# Altium PCB Altium_Export.pcbdoc
Units mil, origin at the board's own origin, x right, y up, seen from the top; angles counter-clockwise.
Board outline 6230 x 6040 mil, 2 copper layers (Top Layer, Bottom Layer); 13 components, 38 nets, 85 pads, 3 vias.
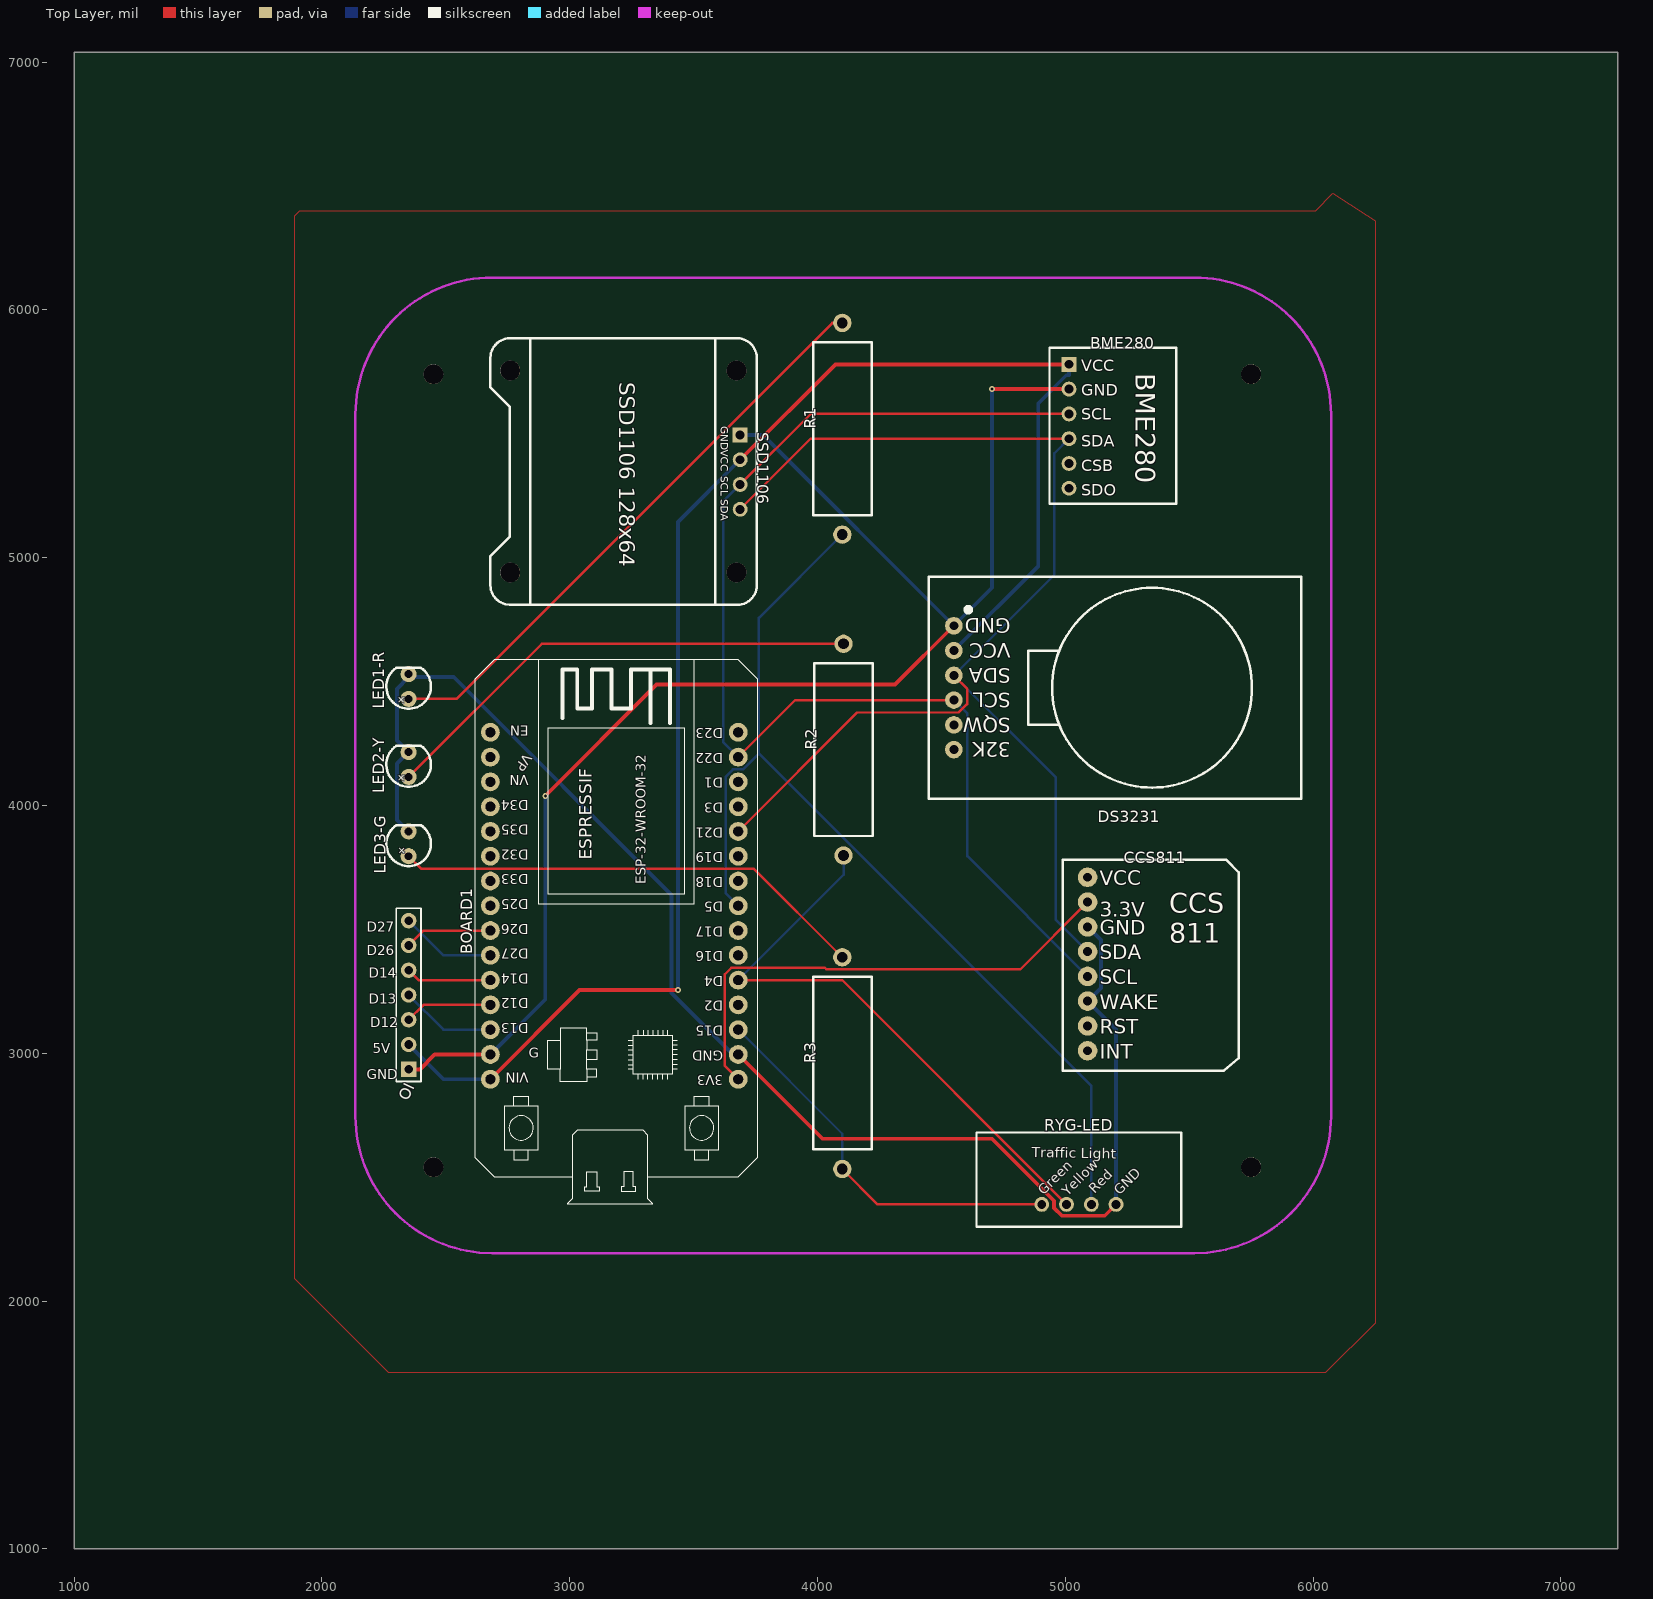
[diagram p0: Top Layer view]
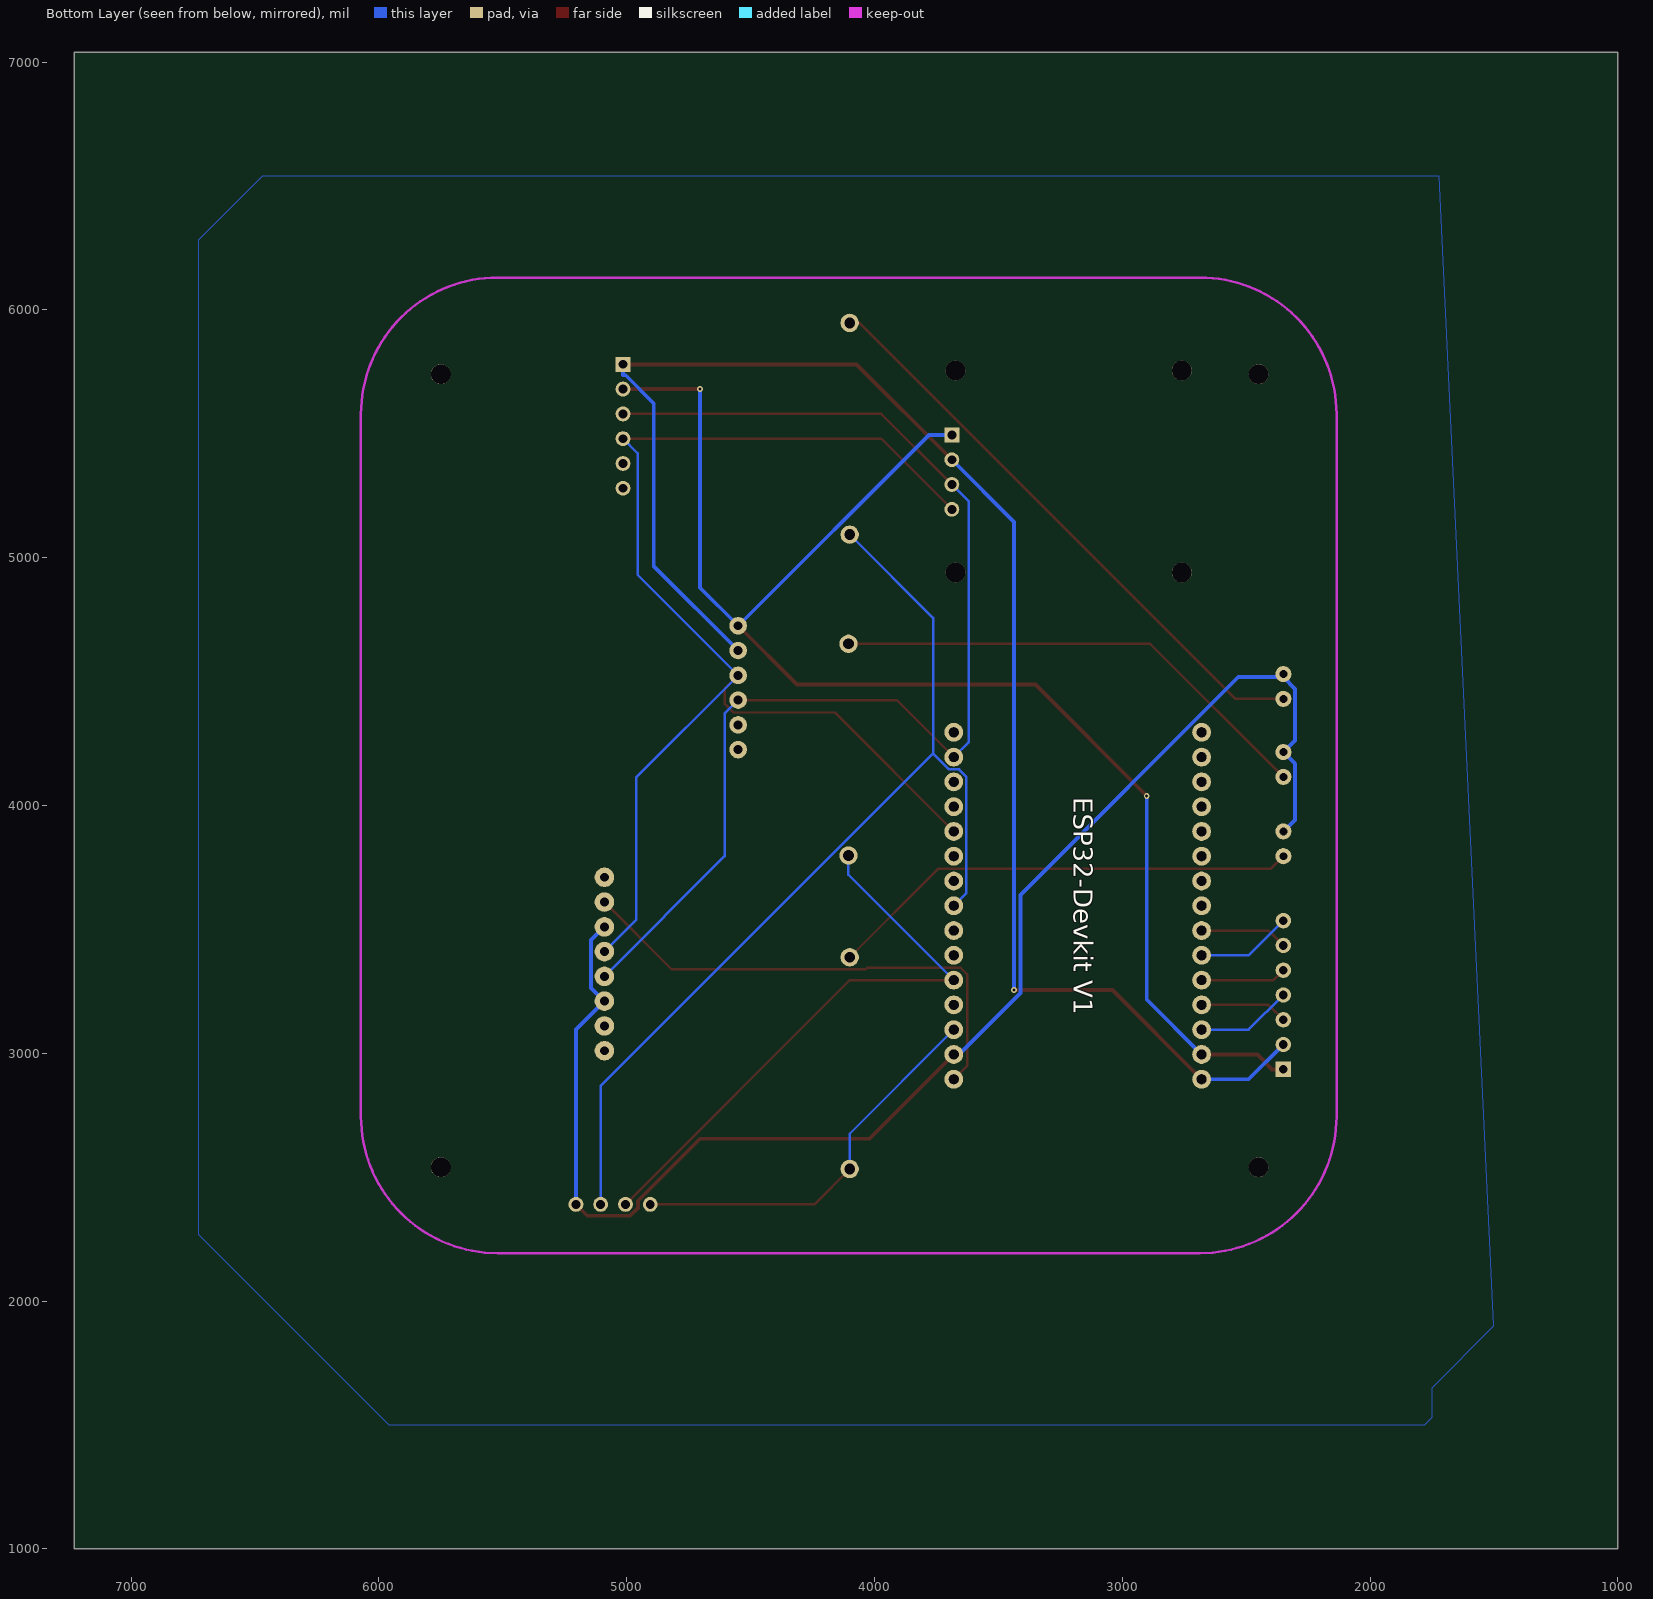
[diagram p1: Bottom Layer view, seen from below]

## Layer stack, top to bottom
Top Layer: signal copper (thickness not stored)
Dielectric: dielectric 12.6, FR-4, Dk 4.8
Bottom Layer: signal copper (thickness not stored)

## Board outline
7230,1000 1000,1000 1000,7040 7230,7040

## Components (designator, comment, footprint, x,y, rotation, side; value= is the part's Value field where it differs from the comment)
BME280 "BME280" BME280 5015,5280 r0 top
BOARD1 "ESP32DEVKITV1" ESP32-DEVKITV1 3680,2895 r90 top
CCS811 "CCS811-1" CCS811-1 4990,2930 r0 top
DS3231 "RTC DS3231" DS3231_FP 4550,4475 r180 top
IO "HEADER - HEADER-FEMALE-2.54_1X7" "HEADER - HEADER-FEMALE-2.54_1X7" 2350,2935 r180 top
LED1-R "LED THROUGH HOLE - SIMPLE" "LED-3MM-2.54MM-THROUGH HOLE" 2350,4530 r90 top
LED2-Y "LED THROUGH HOLE - SIMPLE" "LED-3MM-2.54MM-THROUGH HOLE" 2350,4215 r90 top
LED3-G "LED THROUGH HOLE - SIMPLE" "LED-3MM-2.54MM-THROUGH HOLE" 2350,3895 r90 top
R1 "100Ω" RES-TH_BD6.0-L17.5-P21.50-D0.7 4100,5520 r90 top
R2 "100Ω" RES-TH_BD6.0-L17.5-P21.50-D0.7 4105,4225 r90 top
R3 "100Ω" RES-TH_BD6.0-L17.5-P21.50-D0.7 4100,2960 r90 top
RYG-LED "TrafficLight" "TRAFFIC LIGHT SENSOR MODULE" 5055,2490 r0 top
SSD1106 "SSD1306-OLED-0.96" SSD1306 2680,5885 r270 top

## Footprints (in the part's own frame and the unit in brackets; to place one, negate y for a bottom-side part, rotate by r counter-clockwise, add the part's x,y. Pads: shape width x height; smd on the part's side, far side on the other; paste and mask are expansions set on the pad)
BME280 [mil]
  rect 60x60 hole 35.43: 1(0,500)
  round 60 hole 35.43: 2(0,400) 3(0,300) 4(0,200) 5(0,100) 6(0,0)
  silkscreen extent -79,-63 433,567
CCS811-1 [mil]
  round 78.74 hole 36: 1(100,80) 2(100,180) 3(100,280) 4(100,380) 5(100,480) 6(100,580) 7(100,680) 8(100,780)
  silkscreen extent 0,0 710,850
DS3231_FP [mm]
  round 1.8 hole 0.914: 1(0,-6.35) 2(0,-3.81) 3(0,-1.27) 4(0,1.27) 5(0,3.81) 6(0,6.35)
  silkscreen extent -35.61,-11.38 2.58,11.38
ESP32-DEVKITV1 [mil]
  round 76 hole 39.36: 3V3(0,0) D1(1200,0) D2(300,0) D3(1100,0) D4(400,0) D5(700,0) D12(300,1000) D13(200,1000) D14(400,1000) D15(200,0) D16(500,0) D17(600,0) D18(800,0) D19(900,0) D21(1000,0) D22(1300,0) D23(1400,0) D25(700,1000) D26(600,1000) D27(500,1000) D32(900,1000) D33(800,1000) D34(1100,1000) D35(1000,1000) EN(1400,1000) GND(100,1000) GND@1(100,0) VIN(0,1000) VN(1200,1000) VP(1300,1000)
  silkscreen extent -502,-79 1693,1063
"HEADER - HEADER-FEMALE-2.54_1X7" [mil]
  rect 62x62 hole 35: 1(0,0)
  round 62 hole 35: 2(0,-100) 3(0,-200) 4(0,-300) 5(0,-400) 6(0,-500) 7(0,-600)
  silkscreen extent -50,-650 50,50
"LED-3MM-2.54MM-THROUGH HOLE" [mm]
  round 1.65 hole 0.8: 1(-2.54,0) 2(0,0)
  silkscreen extent -3.55,-2.28 0.64,2.28
RES-TH_BD6.0-L17.5-P21.50-D0.7 [mil]
  round 74 hole 43.31: 1(-427.17,0) 2(427.16,0)
  silkscreen extent -348,-118 348,118
SSD1306 [mil]
  rect 60x60 hole 36: 1(390,1007.87)
  round 60 hole 36: 2(490,1007.9) 3(590,1007.9) 4(690,1007.9)
  round 80 hole 80 unplated: ""(130,993.4) ""(130,80) ""(945,993.4) ""(945,80)
  silkscreen extent 0,0 1075,1075
"TRAFFIC LIGHT SENSOR MODULE" [mil]
  round 60 hole 36: 1(-150,-100) 2(-50,-100) 3(50,-100) 4(150,-100)
  silkscreen extent -413,-190 413,190

## Free pads (board coordinates)
  round 80 hole 80 unplated: ""(2450,2540) ""(2450,5740) ""(5750,2540) ""(5750,5740)

## Via types
v1: diameter 24.02, hole 12.01, Top Layer to Bottom Layer, tented both sides, 3 vias

## Nets (pads, with @x,y where several pads share a name; then routed paths per layer and width w, separated by ;. In a path a pad name is that pad's centre, name@x,y a point inside that pad or via, vN(x,y) a via of type N, cw(c..) or ccw(c..) an arc to the next point about the centre after c; other vN are vias at no path point)
3.3V: BOARD1.3V3 CCS811.7 | length 2034.9
  Top Layer w10: BOARD1.3V3 3626.57,2948.43 3626.57,3318.78 3652.79,3345 4030.05,3345 4036.04,3339.01 4819.01,3339.01 CCS811.7
5V: BME280.1 BOARD1.VIN DS3231.2 IO.2 SSD1106.2 | length 6378.8
  Top Layer w15.75: BOARD1.VIN 3039.59,3254.59 v1(3436.7,3254.59) ; SSD1106.2 4072.9,5780 BME280.1
  Bottom Layer w15.75: IO.2 2490,2895 BOARD1.VIN ; v1(3436.7,3254.59) 3436.7,5143.8 SSD1106.2 ; DS3231.2 4891.03,4966.03 4891.03,5622.9 5003.95,5735.82 5015,5735.82 BME280.1
BME280_5: BME280.5
BME280_6: BME280.6
BOARD1_D1: BOARD1.D1
BOARD1_D2: BOARD1.D2
BOARD1_D3: BOARD1.D3
BOARD1_D12: BOARD1.D12 IO.3 | length 354.9
  Top Layer w10: IO.3 2410,3195 BOARD1.D12
BOARD1_D13: BOARD1.D13 IO.4 | length 388
  Bottom Layer w10: IO.4 2490,3095 BOARD1.D13
BOARD1_D14: BOARD1.D14 IO.5 | length 346.6
  Top Layer w10: IO.5 2390,3295 BOARD1.D14
BOARD1_D16: BOARD1.D16
BOARD1_D17: BOARD1.D17
BOARD1_D23: BOARD1.D23
BOARD1_D25: BOARD1.D25
BOARD1_D26: BOARD1.D26 IO.6 | length 354.9
  Top Layer w10: IO.6 2410,3495 BOARD1.D26
BOARD1_D27: BOARD1.D27 IO.7 | length 388
  Bottom Layer w10: IO.7 2490,3395 BOARD1.D27
BOARD1_D32: BOARD1.D32
BOARD1_D33: BOARD1.D33
BOARD1_D34: BOARD1.D34
BOARD1_D35: BOARD1.D35
BOARD1_EN: BOARD1.EN
BOARD1_VN: BOARD1.VN
BOARD1_VP: BOARD1.VP
D4: BOARD1.D4 R2.1 RYG-LED.2 | length 2378.7
  Top Layer w10: BOARD1.D4 4100,3295 RYG-LED.2
  Bottom Layer w10: BOARD1.D4 4105,3720 R2.1
D5: BOARD1.D5 R1.1 RYG-LED.3 | length 4112.4
  Bottom Layer w10: BOARD1.D5 3629.06,3645.94 3629.06,4115.18 3658.88,4145 3699.89,4145 3763.6,4208.71 ; R1.1 3763.6,4756.43 3763.6,4208.71 ; RYG-LED.3 5105,2867.31 3763.6,4208.71
D15: BOARD1.D15 R3.1 RYG-LED.1 | length 1600.3
  Top Layer w10: R3.1 4242.83,2390 RYG-LED.1
  Bottom Layer w10: BOARD1.D15 4100,2675 R3.1
D18: BOARD1.D18
D19: BOARD1.D19
D21: BME280.4 BOARD1.D21 CCS811.5 DS3231.3 SSD1106.4 | length 5206
  Top Layer w10: BOARD1.D21 4160,4375 4569.56,4375 4603.51,4408.95 4603.51,4471.49 DS3231.3 ; SSD1106.4 3972.9,5480 BME280.4
  Bottom Layer w10: BME280.4 4956.06,5421.06 4956.06,4931.06 DS3231.3 4962.29,4112.71 4962.29,3537.71 CCS811.5
D22: BME280.3 BOARD1.D22 CCS811.4 DS3231.4 SSD1106.3 | length 4902.6
  Top Layer w10: BOARD1.D22 3910,4425 DS3231.4 ; SSD1106.3 3972.9,5580 BME280.3
  Bottom Layer w10: BOARD1.D22 3619.42,4255.58 3619.42,5226.52 SSD1106.3 ; DS3231.4 4604.75,4370.25 4604.75,3795.25 CCS811.4
DS3231_5: DS3231.5
DS3231_6: DS3231.6
GND: BME280.2 BOARD1.GND DS3231.1 IO.1 SSD1106.1 | length 5934.1
  Top Layer w15.75: IO.1 2395.18,2935 2455.18,2995 BOARD1.GND ; v1(2901.37,4038.27) 3350.67,4487.57 4312.57,4487.57 DS3231.1 ; v1(4703.51,5680) BME280.2
  Bottom Layer w15.75: BOARD1.GND 2901.37,3216.37 v1(2901.37,4038.27) ; SSD1106.1 3780,5495 DS3231.1 4703.51,4878.51 v1(4703.51,5680)
GND2: BOARD1.GND@1 CCS811.3 CCS811.6 LED1-R.2 LED2-Y.2 LED3-G.2 RYG-LED.4 | length 5948
  Top Layer w15.75: 3680,2995 4020.18,2654.82 4704.95,2654.82 4955,2404.77 4955,2375.28 4986.04,2344.24 5159.24,2344.24 RYG-LED.4
  Bottom Layer w15.75: LED3-G.2 2303.34,3941.66 2303.34,4168.34 LED2-Y.2 2302.76,4262.24 2302.76,4470.36 LED1-R.2@2350,4517.6 ; LED1-R.2 LED1-R.2@2350,4517.6 ; 3680,2995 3659.26,2995 3410.51,3243.75 3410.51,3639.26 2532.17,4517.6 LED1-R.2@2350,4517.6 ; CCS811.6 5143.67,3456.33 5143.67,3263.67 CCS811.3 5205,3095 RYG-LED.4
R1_2: LED1-R.1 R1.2 | length 2378.4
  Top Layer w10: LED1-R.1 2542.72,4430 4059.88,5947.16 R1.2
R2_2: LED2-Y.1 R2.2 | length 1977.5
  Top Layer w10: LED2-Y.1 2887.16,4652.16 R2.2
R3_2: LED3-G.1 R3.2 | length 1918.9
  Top Layer w10: LED3-G.1 2400,3745 3742.16,3745 R3.2
S$32: 
pads on no net: CCS811.1 CCS811.2 CCS811.8 SSD1106.

## Polygon pours and split planes (outlines as drawn)
GND on Bottom Layer (solid): 1720,6540 6470,6540 6730,6280 6730,2270 5960,1500 1780,1500 1750,1530 1750,1650 1500,1900
GND on Top Layer (solid): 6250,6360 6250,1910 6050,1710 2270,1710 1890,2090 1890,6380 1910,6400 6010,6400 6080,6470

## Keep-outs
Keep-Out Layer:
  lines w10: 2135.44,2744.33 ccw(c2686.62,2744.33) 2686.62,2193.15 ; 2135.44,5578.97 cw(c2686.62,5578.97) 2686.62,6130.15 ; 5521.26,2193.15 ccw(c5521.26,2744.33) 6072.44,2744.33 ; 5521.26,6130.15 cw(c5521.26,5578.97) 6072.44,5578.97

## Silkscreen, mask and mechanical layers (free items; w line width, h text height)
Top Overlay:
  text "D27" at 2180,3490.32 h39.37
  text "D26" at 2180,3395.32 h39.37
  text "D14" at 2190,3305.32 h39.37
  text "D13" at 2190,3200.32 h39.37
  text "D12" at 2195,3105.32 h39.37
  text "5V" at 2205,3000.32 h39.37
  text "GND" at 2180,2895.32 h39.37

## Text inside footprints (layer, text, board x,y; h text height)
BME280: Top Overlay "VCC" at 5064.3,5752.18 h47.24; Top Overlay "GND" at 5064.1,5653.78 h47.24; Top Overlay "SCL" at 5064.1,5555.38 h47.24; Top Overlay "SDA" at 5064.2,5446.88 h47.24; Top Overlay "CSB" at 5064.3,5348.78 h47.24; Top Overlay "SDO" at 5064.3,5250.18 h47.24
BOARD1: Top Overlay "3V3" at 3619.37,2910.75 h40 r180; Top Overlay "GND" at 3619.37,3010.75 h40 r180; Top Overlay "D15" at 3619.37,3110.75 h40 r180; Top Overlay "D2" at 3619.37,3210.75 h40 r180; Top Overlay "D4" at 3619.37,3310.75 h40 r180; Top Overlay "D16" at 3619.37,3410.75 h40 r180; Top Overlay "D17" at 3619.37,3510.75 h40 r180; Top Overlay "D5" at 3619.37,3610.75 h40 r180; Top Overlay "D18" at 3619.37,3710.75 h40 r180; Top Overlay "D19" at 3619.37,3810.75 h40 r180; Top Overlay "D21" at 3619.37,3910.75 h40 r180; Top Overlay "D3" at 3619.37,4010.75 h40 r180; Top Overlay "D1" at 3619.37,4110.75 h40 r180; Top Overlay "D22" at 3619.37,4210.75 h40 r180; Top Overlay "D23" at 3619.37,4310.75 h40 r180; Top Overlay "VIN" at 2834.73,2921.38 h40 r180; Top Overlay "G" at 2834.73,2981.38 h40; Top Overlay "D13" at 2834.73,3121.38 h40 r180; Top Overlay "D12" at 2834.73,3221.38 h40 r180; Top Overlay "D14" at 2834.73,3321.38 h40 r180; Top Overlay "D27" at 2834.73,3421.38 h40 r180; Top Overlay "D26" at 2834.73,3521.38 h40 r180; Top Overlay "D25" at 2834.73,3621.38 h40 r180; Top Overlay "D33" at 2834.73,3721.38 h40 r180; Top Overlay "D32" at 2834.73,3821.38 h40 r180; Top Overlay "D35" at 2834.73,3921.38 h40 r180; Top Overlay "D34" at 2834.73,4021.38 h40 r180; Top Overlay "VN" at 2834.73,4121.38 h40 r180; Top Overlay "VP" at 2818.35,4212.85 h40 r235; Top Overlay "EN" at 2834.73,4321.38 h40 r180; Bottom Overlay "ESP32-Devkit V1" at 3195.36,4033.58 h76 r90; Document "ESP32-DEVKITV1" at 3858.74,3932.79 h50 r90; Top Overlay "ESPRESSIF" at 3089.45,3780.82 h50 r90; Top Overlay "ESP-32-WROOM-32" at 3305.99,3682.4 h40 r90
CCS811: Top Overlay "VCC" at 5140,3678.27 h59.05; Top Overlay "3.3V" at 5140,3550.47 h59.05; Top Overlay "GND" at 5140,3478.27 h59.05; Top Overlay "SDA" at 5140,3378.27 h59.05; Top Overlay "SCL" at 5140,3278.27 h59.05; Top Overlay "WAKE" at 5140,3178.27 h59.05; Top Overlay "RST" at 5140,3078.27 h59.05; Top Overlay "INT" at 5140,2978.27 h59.05; Top Overlay "CCS / 811" at 5420,3446.4 h80
DS3231: Top Overlay "GND" at 4780,4754.53 h59.05 r180; Top Overlay "VCC" at 4780,4654.53 h59.05 r180; Top Overlay "SDA" at 4780,4554.53 h59.05 r180; Top Overlay "SCL" at 4780,4454.53 h59.05 r180; Top Overlay "SQW" at 4780,4354.53 h59.05 r180; Top Overlay "32K" at 4780,4254.53 h59.05 r180
LED1-R: Top Overlay "+" at 2298.86,4428.86 h31.5 r315
LED2-Y: Top Overlay "+" at 2298.86,4113.86 h31.5 r315
LED3-G: Top Overlay "+" at 2321.14,3793.86 h31.5 r45
RYG-LED: Top Overlay "Traffic Light" at 4864.65,2579.69 h40.63 r359; Top Overlay "Green" at 4913.92,2424.72 h39.37 r45; Top Overlay "Yellow" at 5008.92,2420.97 h39.37 r45; Top Overlay "Red" at 5118.92,2431.08 h39.37 r45; Top Overlay "GND" at 5218.92,2424.71 h39.37 r45
SSD1106: Top Overlay "VCC" at 3609.25,5435 h31.5 r270; Top Overlay "GND" at 3609.25,5530 h31.5 r270; Top Overlay "SCL" at 3610.05,5327.9 h31.5 r270; Top Overlay "SDA" at 3609.65,5235.4 h31.5 r270; Top Overlay "SSD1106 128x64" at 3199.7,5707.8 h62.99 r270